# Allegro board sensor.brd
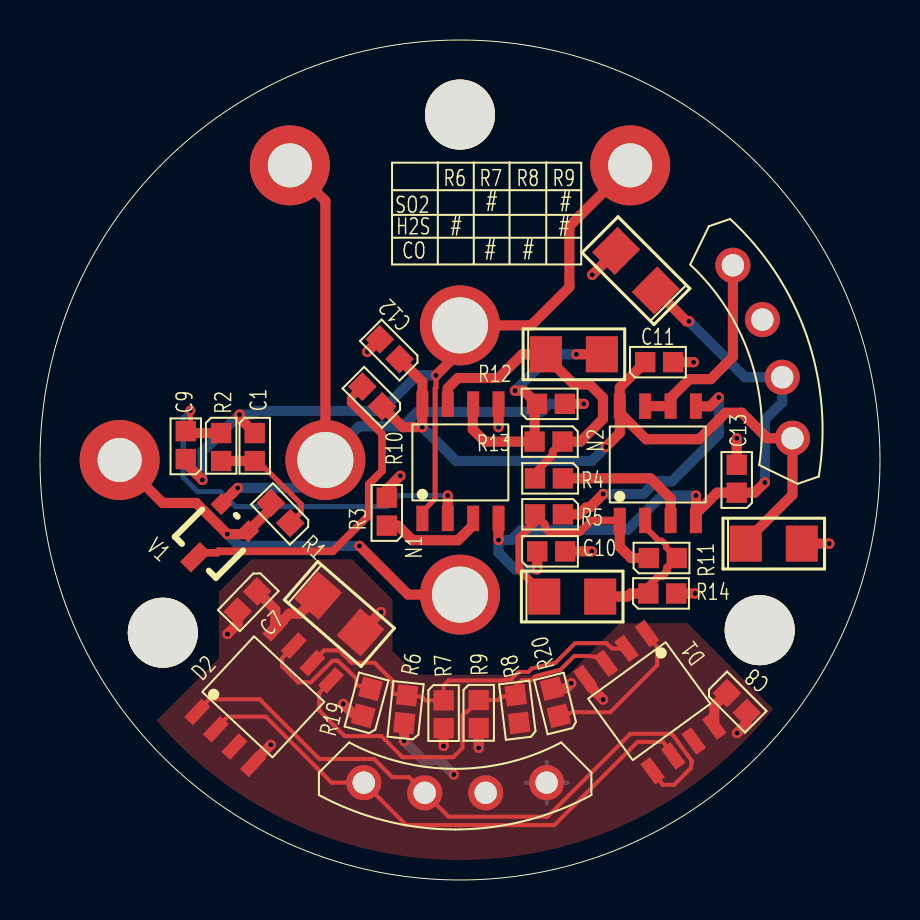
[diagram p0: board, top side]
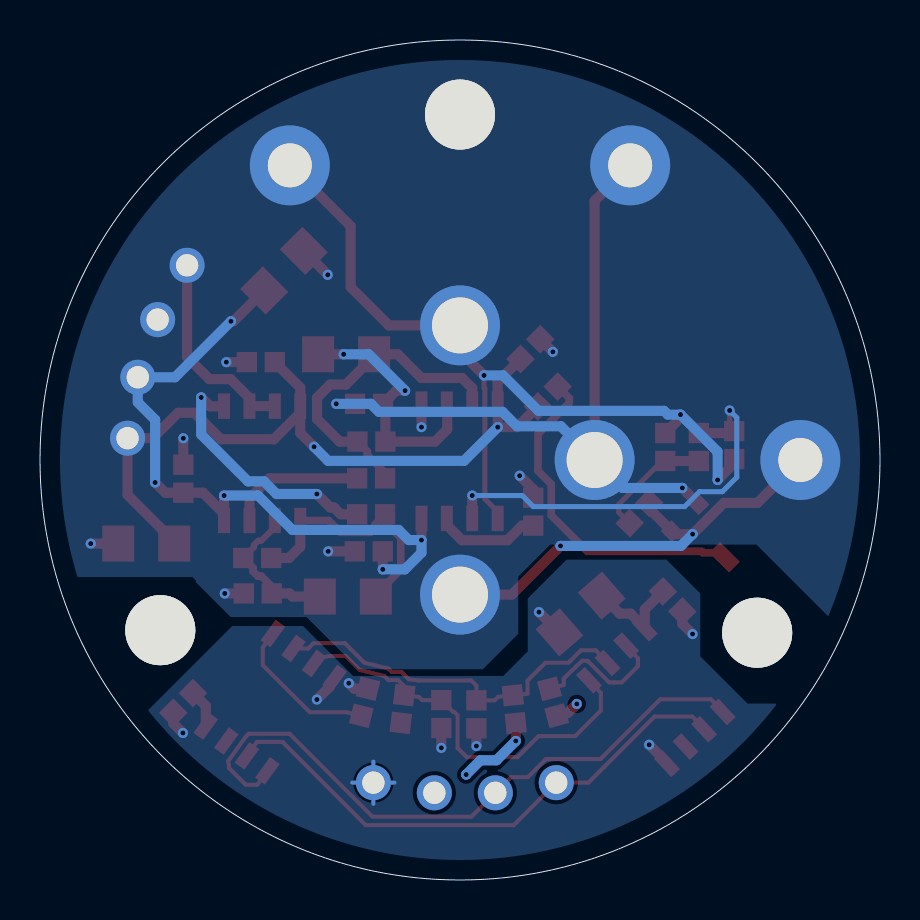
[diagram p1: board, bottom side, seen from below]

Outline 42 x 42 mm; copper layers: TOP, BOTTOM. Coordinates in mm from the lower left corner of the outline.
Outline path: circle c21,21 r21

## Placement (name value [footprint] x y rotation side)
C1  1nF  [0603]  10.74 22.35 270 top
C2  334  [C1206]  26.7 26.29 0 top
C3  10uF/25V  [C1206]  36.69 16.82 0 top
C4  10uF/25V  [C1206]  29.8 30.47 135 top
C5  104  [C1206]  26.61 14.17 0 top
C6  10uF  [C1206]  14.97 13.3 319 top
C7  0.1uF  [0603]  10.86 14.43 226 top
C8  0.1uF  [0603]  34.35 9.35 315 top
C9  10nF  [0603]  7.29 21.05 90 top
C10  0.1uF  [0603]  24.86 16.43 0 top
C11  0.1uF  [0603]  30.26 25.89 0 top
C12  0.1uF  [0603]  17.98 26.05 135 top
C13  0.1uF  [0603]  34.84 19.37 90 top
D1  FM24CL04  [SO8]  30.35 12.32 306 top
D2  FM24CL04  [SO8]  7.87 8.41 47 top
N1  OPA2277U  [SO8]  19.12 18.08 90 top
N2  OP2277U  [SO8]  28.99 17.98 90 top
NOREF  -  [unnamed]  21 38.27 0 top
NOREF#2  -  [unnamed]  35.99 12.49 0 top
NOREF#3  -  [unnamed]  6.14 12.36 0 top
R1  10k  [0603]  12.51 17.85 134 top
R2  10k  [0603]  9.06 22.35 270 top
R3  10k  [0603]  17.34 17.72 90 top
R4  10k  [0603]  26.14 20.08 180 top
R5  10k  [0603]  26.14 18.29 180 top
R6  10k  [0603]  18.21 7.85 84 top
R7  10k  [0603]  20.18 8.98 270 top
R8  10k  [0603]  23.96 7.86 97 top
R9  10k  [0603]  21.94 9 270 top
R10  1M  [0603]  17.1 23.68 135 top
R11  47k  [0603]  30.44 16.1 0 top
R12  100R  [0603]  24.85 23.81 0 top
R13  1k  [0603]  26.13 21.92 180 top
R14  4.7k  [0603]  30.42 14.33 0 top
R19  10k  [0603]  16.16 8.21 75 top
R20  10k  [0603]  25.94 8.21 104 top
TP2  4CF  [CO_4CF]  21 27.73 0 top
TP3  4S  [SO2_4S]  29.51 35.73 0 top
TP5  4CF  [CO_4CF]  21 14.27 0 top
TP6  4S  [SO2_4S]  3.98 21 0 top
TP8  4CF  [CO_4CF]  14.27 21 0 top
TP9  4S  [SO2_4S]  12.49 35.73 0 top
V1  SST117  [SOT23]  10.42 17.45 135 top
X1  HEADER 4  [SIP4_CIR]  16.19 4.87 0 top
X2  HEADER 4  [SIP4_CIR]  37.62 22.09 109 top

## Library data of the parts
C1 C7-C13 = 0.01uFCapacitor16V10%0402
C2-C6 = CT2012_0
D1 = AT24C04_1
D2 = AT24C04_2
N1 N2 = AD8072
R1-R14 R19 R20 = R1005_0
TP2 TP3 TP5 TP6 TP8 TP9 = TEST POINT_0
V1 = 2N4851_2
X1 X2 = HEADER 4

## Footprints (pads in the part's own frame, mm; a bottom-side part is the same pattern mirrored in y, then rotated)
0603
  rect 1.016x1.016 smd: 1(0,0) 2(1.397,0)
C1206
  rect 1.6x1.803 smd: 1(-1.4,0) 2(1.4,0)
CO_4CF
  round 4 hole 2.8: 1(0,0)
SIP4_CIR
  round 1.753 hole 1.118: 1(0,0) 2(3.048,-0.508) 3(6.096,-0.508) 4(9.144,0)
SO2_4S
  round 4 hole 2.2: 1(0,0)
SO8
  rect 1.27x0.6 smd: 1(0,0) 2(0,-1.27) 3(0,-2.54) 4(0,-3.81) 5(5.715,-3.81) 6(5.715,-2.54) 7(5.715,-1.27) 8(5.715,0)
SOT23
  rect 0.762x0.787 smd: 1(0,0) 2(1.905,0)
  rect 0.762x1.397 smd: 3(0.95,2.799)
unnamed
  round 3.5 hole 3.5: (0,0)

## Nets
+3.3VD: C6.1 C7.1 C8.1 D1.8(VCC) D2.8(VCC) R6.1 R8.1 R19.1 X1.3
+12V: C3.1 C11.1 C12.1 N1.8(V+) N2.8(V+) R10.1 X2.1
-12V: C4.1 C10.1 C13.1 N1.4(V-) N2.4(V-) X2.2
AGND: C3.2 C4.2 C10.2 C11.2 C12.2 C13.2 N1.5(IN+) R3.2 R14.2 X2.3
DGND: C6.2 C7.2 C8.2 D1.4(GND) D2.4(GND) R7.2 R9.2 R20.2 X1.4
A1: D1.2(A1) D2.6(A1) R6.2 R7.1
A2: D1.3(A2) D2.5(A2) R8.2 R9.1
CE: C1.1 C9.1 N1.1(OUT) TP2.1 TP3.1
SCL: D1.6(SCL) D2.2(SCL) X1.1
SDA: D1.5(SDA) D2.1(SDA) X1.2
SO2: N2.6(IN-) N2.7(OUT) X2.4
WE: R12.2 TP8.1 TP9.1 V1.2(S)
N16750688: C2.2 N1.6(IN-) R12.1 R13.2
N16750692: N2.3(IN+) R4.1
N16750696: N2.5(IN+) R5.1
N16750700: C5.1 N2.1(OUT) R5.2 R11.1
N16750707: C2.1 N1.7(OUT) R4.2 R13.1
N16750928: C5.2 N2.2(IN-) R11.2 R14.1
N16752562: C1.2 R1.1 R2.2
N16752705: C9.2 N1.2(IN-) R2.1
N16752915: R1.2 TP5.1 TP6.1 V1.1(D)
N16752936: R10.2 V1.3(G)
N16754242: D2.7(A0) R19.2
N16756486: D1.1(A0) R20.1
N16762157: N1.3(IN+) R3.1

Pads without a net: D1 7; D2 3

## Via types
v1: diameter 0.508, hole 0.254, TOP to BOTTOM, 40 vias

## Routing (per net, layer and track width the routed paths; a pad name or vN(x,y) marks a point on that pad's centre or on a via; arc(x,y) is an arc through that point)
+3.3VD: length 12.2
  TOP w0.508: C7.1 11.76,13.52 11.76,12.61 ; R19.1 15.6,8.36 v1(15.16,8.8) ; 11.76,12.61 12.47,13.32 13.01,13.32 C6.1 ; 11.76,12.61 D2.8 ; C8.1 33.71,8.71 D1.8 ; R6.1 18.21,6.95 v1(18.21,6.95)
  BOTTOM w0.508: v1(18.21,6.95) 19.18,5.99 19.98,5.99 v1(20.69,5.27)
+12V: length 38
  TOP w0.508: R10.1 18.14,22.64 v1(19.11,22.64) 19.11,23.79 N1.8 19.12,24.91 C12.1 ; 28.99,23.36 28.99,22.35 v1(28.3,21.66) ; 28.99,23.36 N2.8 28.99,24.62 C11.1 ; 28.99,23.36 30.31,22.04 32.96,22.04 34.28,23.36 35.09,23.36 36.37,22.09 X2.1 37.62,19.26 35.29,16.92 C3.1
  BOTTOM w0.508: v1(28.3,21.66) 27.59,20.96 20.8,20.96 v1(19.11,22.64)
-12V: length 34.8
  TOP w0.508: C4.1 32.33,27.93 v1(32.45,27.93) ; N1.4 v1(22.93,17) ; 32.8,18.31 33.85,19.37 C13.1 35.73,19.37 v1(36.24,19.87) ; 32.8,18.31 N2.4 ; 32.8,18.31 v1(32.8,19.22) ; C10.1 v1(24.86,15.53)
  BOTTOM w0.508: v1(36.24,19.87) 36.24,23.01 37.11,23.88 X2.2 35.25,25.14 v1(32.45,27.93) ; v1(24.86,15.53) 23.76,15.53 22.93,16.36 v1(22.93,17) 23.56,17 24.07,17.5 29.38,17.5 31.1,19.22 v1(32.8,19.22)
AGND: length 11.1
  TOP w0.508: C13.2 v1(34.84,22.09) ; v1(27.61,30.26) 27.9,30.55 27.9,30.55 C4.2 ; R3.2 17.34,19.53 v1(18.02,20.21) ; C11.2 v1(32.68,25.89) ; C10.2 v1(27.59,16.43) ; R14.2 v1(32.76,14.33) ; C3.2 v1(39.46,16.82) ; C12.2 v1(16.36,26.41) ; N1.5 v1(22.93,22.64)
DGND: length 13.9
  TOP w0.508: v1(28.16,9.02) 27.53,9.65 27.53,9.82 D1.4 ; v1(9.37,12.3) 9.88,12.81 C7.2 ; C6.2 16.04,12.38 v1(17.05,13.4) ; R7.2 v1(20.18,6.7) ; R9.2 v1(21.94,6.61) ; v1(34.85,7.35) 35.34,7.83 C8.2 ; D2.4 10.65,5.87 v1(11.54,6.76) ; R20.2 26.29,9.57 v1(26.56,9.84)
  BOTTOM w0.203: X1.4 25.33,5.92 ; X1.4 25.33,3.81 ; X1.4 24.28,4.87 ; X1.4 26.39,4.87
A1: length 19
  TOP w0.203: D1.2 28.59,11.58 28.32,11.84 26.76,11.84 25.78,10.87 24.58,10.57 24.41,10.4 23.93,10.4 23.56,10.04 23.06,9.97 20.43,9.97 20.18,9.72 R7.1 19.27,8.98 19.09,9.16 R6.2 17.63,9.31 17.63,9.97 16.73,10.86 15.58,10.86 15.47,10.96 14.95,11.48 14.21,11.48 D2.6
A2: length 20.4
  TOP w0.203: D2.5 13.96,9.35 13.96,8.47 15.24,7.19 17.07,7.19 18.13,6.14 20.66,6.14 21.12,6.6 21.12,8.23 21.3,8.41 21.35,8.41 R9.1 22.9,9 23.06,9.15 R8.2 23.79,9.69 24.1,10 24.58,10 24.79,10.2 26.02,10.51 26.71,11.2 27.46,11.2 28.1,11.1 D1.3
CE: length 41.3
  TOP w0.254: N1.1 19.12,18.41 19.76,19.05 19.76,24.57 19.8,24.61 v1(19.8,25.23)
  TOP w0.508: v1(19.8,25.23) 21,26.43 TP2.1 24.55,27.73 26.47,29.65 26.47,32.69 TP3.1 ; C1.1 9.98,23.11 v1(9.98,23.27) ; C9.1 7.29,20.83 v1(8.12,20)
  BOTTOM w0.508: v1(8.12,20) 8.12,21.42 v1(9.98,23.27) 10.61,23.27 10.8,23.46 17.07,23.46 18.85,25.23 v1(19.8,25.23)
SCL: length 27.5
  TOP w0.203: D1.6 31.15,6.9 29.88,6.9 25.71,2.74 18.31,2.74 X1.1 14.58,4.87 13.81,5.64 11.28,8.17 9.38,8.17 D2.2
SDA: length 32.8
  TOP w0.203: D1.5 31.14,4.76 31.71,4.76 32.55,5.6 32.55,5.7 32.59,5.95 31.7,7.18 31.56,7.31 29.52,7.31 25.37,3.16 20.43,3.16 X1.2 18.45,5.14 17.61,5.14 16.7,6.05 13.97,6.05 10.99,9.04 8.45,9.04 D2.1
SO2: length 10.2
  TOP w0.508: N2.7 N2.6 31.53,24.1 32.47,25.04 33.53,25.04 34.65,26.15 X2.4
WE: length 36.6
  TOP w0.508: TP9.1 14.27,33.95 TP8.1 ; v1(9.88,19.6) 9.62,19.34 9.62,19.34 V1.2 ; R12.2 v1(27.19,23.81)
  BOTTOM w0.508: v1(9.88,19.6) 12.87,19.6 TP8.1 15.95,22.68 18.15,22.68 18.87,23.41 25.05,23.41 25.45,23.81 v1(27.19,23.81)
N16750688: length 13
  TOP w0.508: N1.6 21.64,23.78 21.64,22.53 22.25,21.92 R13.2 24.73,23.69 R12.1 24.19,24.47 v1(23.75,24.47) ; C2.2 v1(26.82,26.29)
  BOTTOM w0.508: v1(26.82,26.29) 25.56,26.29 v1(23.75,24.47)
N16750692: length 6.9
  TOP w0.508: R4.1 30.53,20.08 31.53,19.08 N2.3
N16750696: length 12.6
  TOP w0.508: R5.1 26.96,18.29 27.3,18.63 27.48,18.63 v1(28.16,19.3) ; N2.5 32.81,23.68 33.49,23.68 v1(33.94,24.13)
  BOTTOM w0.508: v1(28.16,19.3) 30.17,19.3 30.8,19.93 31.6,19.93 33.94,22.28 v1(33.94,24.13)
N16750700: length 12.9
  TOP w0.381: C5.1 25.21,14.27 23.96,15.52 23.96,17.1 24.75,17.89 R5.2 25.24,17.79 25.24,17.61 25.47,17.38 26.98,17.38 27.57,17.98 N2.1
  TOP w0.508: R11.1 29.55,16.1 28.99,16.66 N2.1
N16750707: length 16.2
  TOP w0.381: R4.2 24.75,20.36 25.63,21.25 25.63,21.42 R13.1
  TOP w0.508: R13.1 27.02,21.92 28.15,23.05 28.15,24.11 27.49,24.77 26.71,24.77 25.3,26.18 C2.1 24.11,26.29 22.93,25.1 20.9,25.1 20.39,24.59 N1.7
N16750928: length 7.6
  TOP w0.305: N2.2 30.26,17.64 30.94,16.96 31.1,16.96 31.3,16.76 31.3,16.63 R11.2
  TOP w0.381: R11.2 31.34,15.6 31.34,15.43 31.11,15.2 30.94,15.2 30.42,14.68 R14.1
  TOP w0.508: R14.1 29.53,14.33 29.37,14.17 C5.2
N16752562: length 6.1
  TOP w0.254: R1.1 13.06,18.38 13.06,18.79 10.9,20.95 C1.2
  TOP w0.508: R2.2 C1.2
N16752705: length 21.6
  TOP w0.254: C9.2 7.52,22.67 v1(7.52,23.48)
  TOP w0.508: C9.2 7.39,22.35 R2.1 ; N1.2 v1(20.39,19.22)
  BOTTOM w0.254: v1(20.39,19.22) 17.89,19.22 17.34,18.67 9.77,18.67 9.02,19.42 7.88,19.42 7.16,20.14 7.16,23.12 v1(7.52,23.48)
N16752915: length 22.8
  TOP w0.508: TP5.1 18.41,14.27 v1(15.97,16.7) ; R1.2 11.54,18.57 V1.1 10.27,17.29 v1(9.37,17.29) 7.81,18.85 6.13,18.85 TP6.1
  BOTTOM w0.508: v1(15.97,16.7) 9.96,16.7 v1(9.37,17.29)
N16752936: length 17.1
  TOP w0.381: V1.3 7.99,16.36 8.85,16.36 8.92,16.44 14.64,16.44 16.44,18.23 16.44,19.79 17.1,20.45 17.1,22.3 15.53,23.87 15.53,24.08 R10.2
N16754242: length 7.2
  TOP w0.203: R19.2 15.81,9.75 15.81,10.07 15.42,10.46 14.88,10.96 14.63,10.96 14.62,10.96 13.54,9.88 13.29,9.87 13.28,9.88 12.91,9.88 12.1,10.69 12.1,11.09 D2.7
N16756486: length 7.7
  TOP w0.203: R20.1 26.65,8.39 28.51,8.39 30.86,10.74 30.86,11.62 D1.1
N16762157: length 5.3
  TOP w0.508: N1.3 21.66,17.74 20.9,16.99 18.63,16.99 17.9,17.72 R3.1

## Copper pours and planes (outline as drawn; the poured copper is in the pictures)
+3.3VD on TOP: 36.66,8.55 21.37,1 5.82,7.98 8.94,11.1 8.94,14.36 8.92,14.38 10.58,16.04 15.6,16.04 17.62,14.02 17.62,11.46 18.83,10.26 26.41,10.26 28.89,12.73 28.89,12.84 32.37,12.84
AGND on BOTTOM: 19.86,10.54 18.09,12.31 18.09,15.17 16.49,16.77 6.18,16.77 2.59,13.19 19.96,40.97 40.12,15.14 34.38,15.14 34.21,14.98 34.21,14.89 32.47,13.15 28.67,13.15 26.06,10.54
DGND on BOTTOM: 36.6,8.48 20.82,1 5.17,8.77 5.23,8.83 6.63,8.83 8.99,11.18 8.99,14.33 10.67,16.02 15.67,16.02 17.61,14.08 17.61,11.44 18.84,10.2 26.34,10.2 28.84,12.7 32.38,12.7

## Text on the board
Ref Des/Silkscreen Top: SO2 | H2S | CO | R6 | # | R7 | R8 | R9
NCLEGEND-1-2: FIGURE | SIZE | 10.0 | 44.0 | 86.614 | 110.236 | DRILL CHART: TOP to BOTTOM | ALL UNITS ARE IN MILS | PLATED | QTY | 40 | 8 | 3 | 6
